# Altium PCB sanpell_cpu_v5.0.4.pcbdoc (part 1 of 2)
Units mm, origin at the board's own origin, x right, y up, seen from the top; angles counter-clockwise.
Board outline 91.48 x 91.59 mm, 4 copper layers (Top Layer, PWR, GND, Bottom Layer); 81 components, 92 nets, 356 pads, 103 vias.
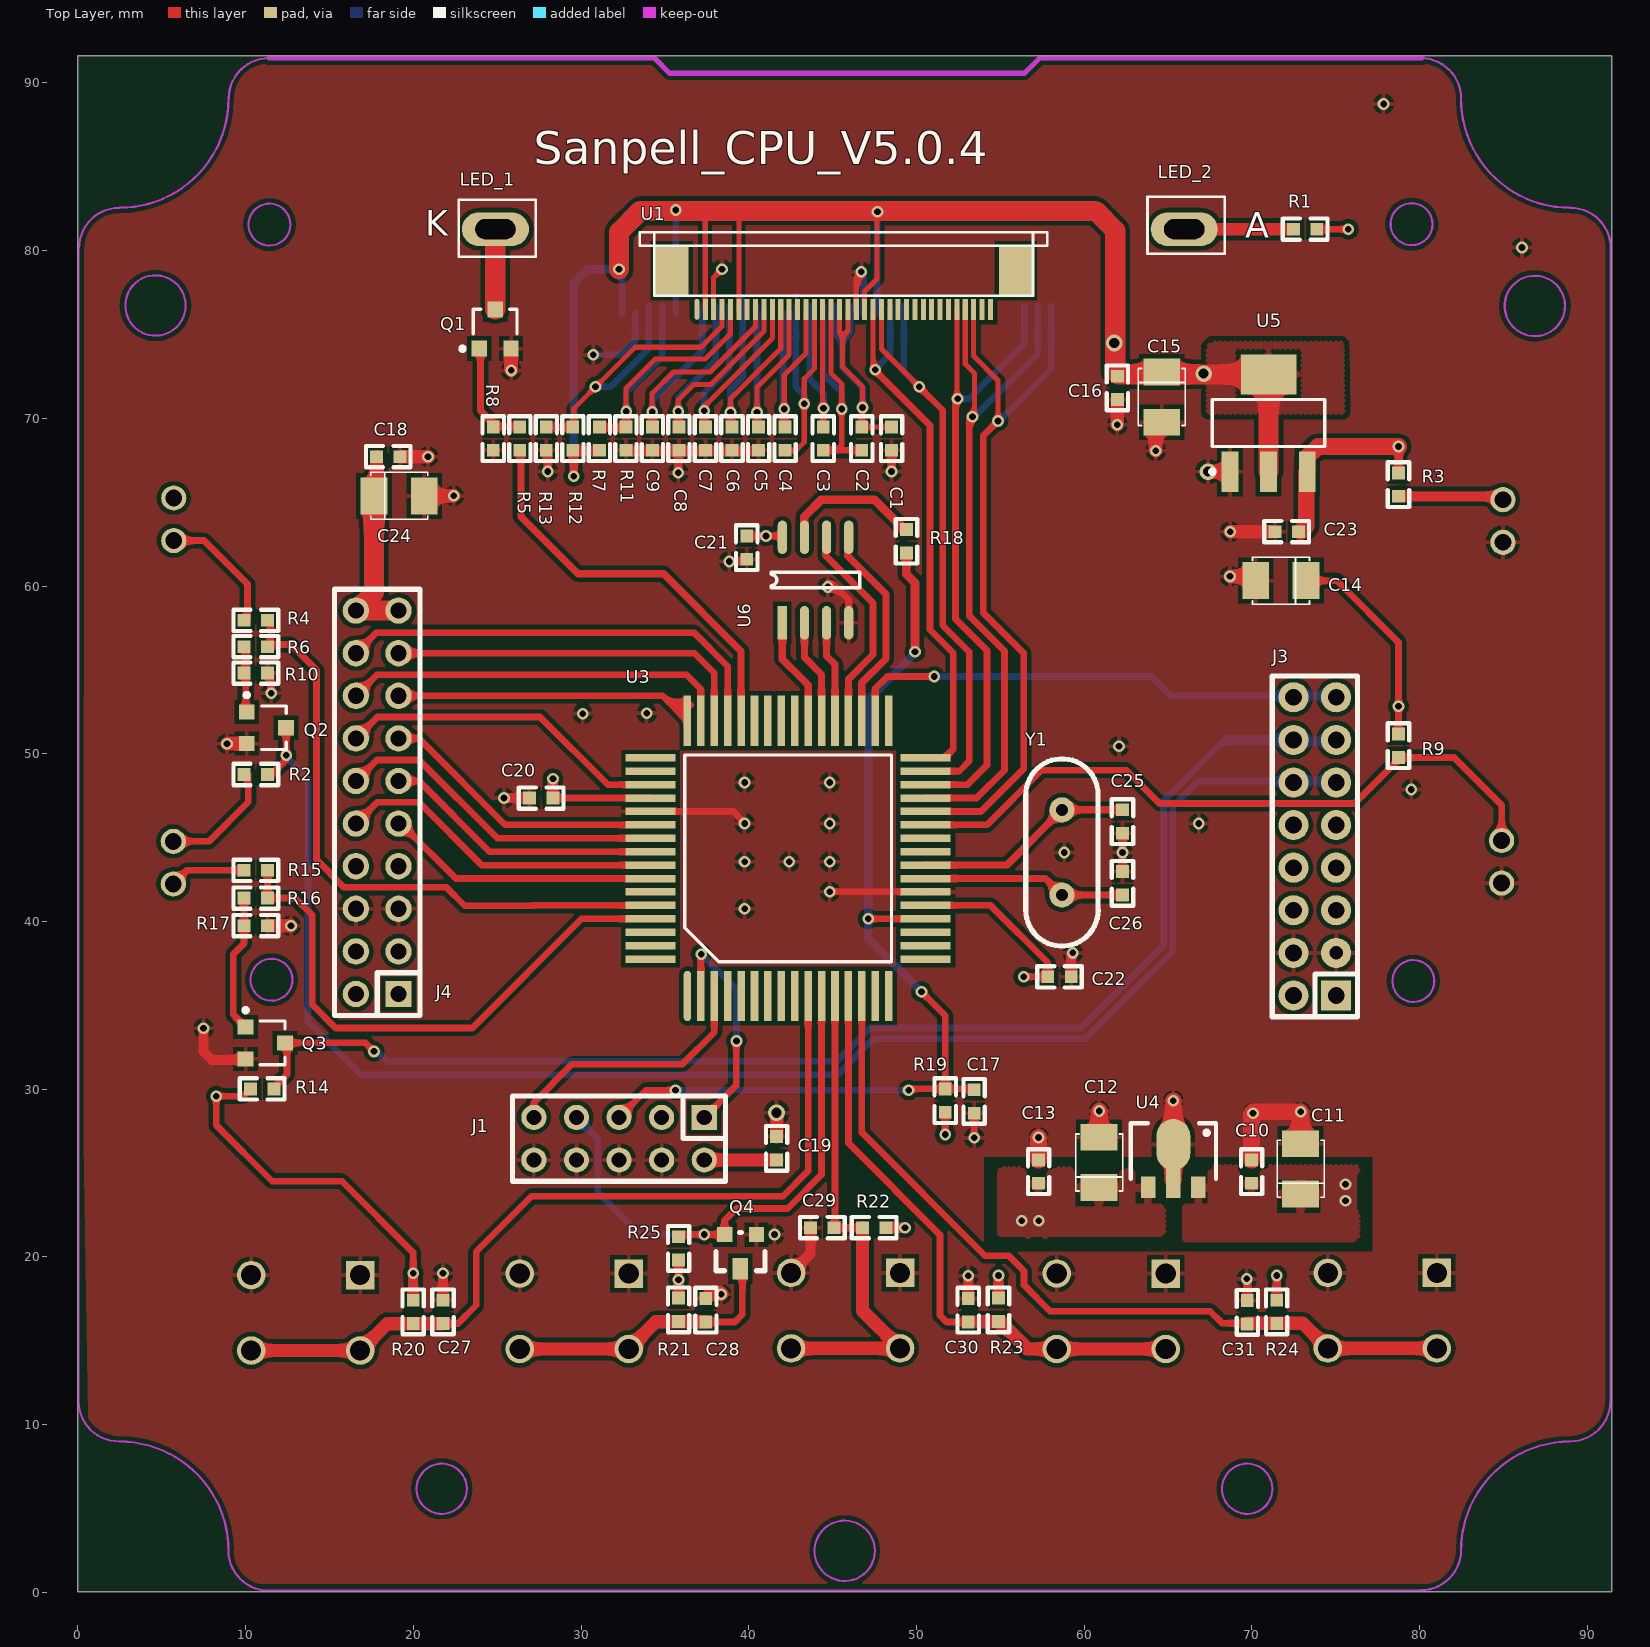
[diagram p0: Top Layer view]
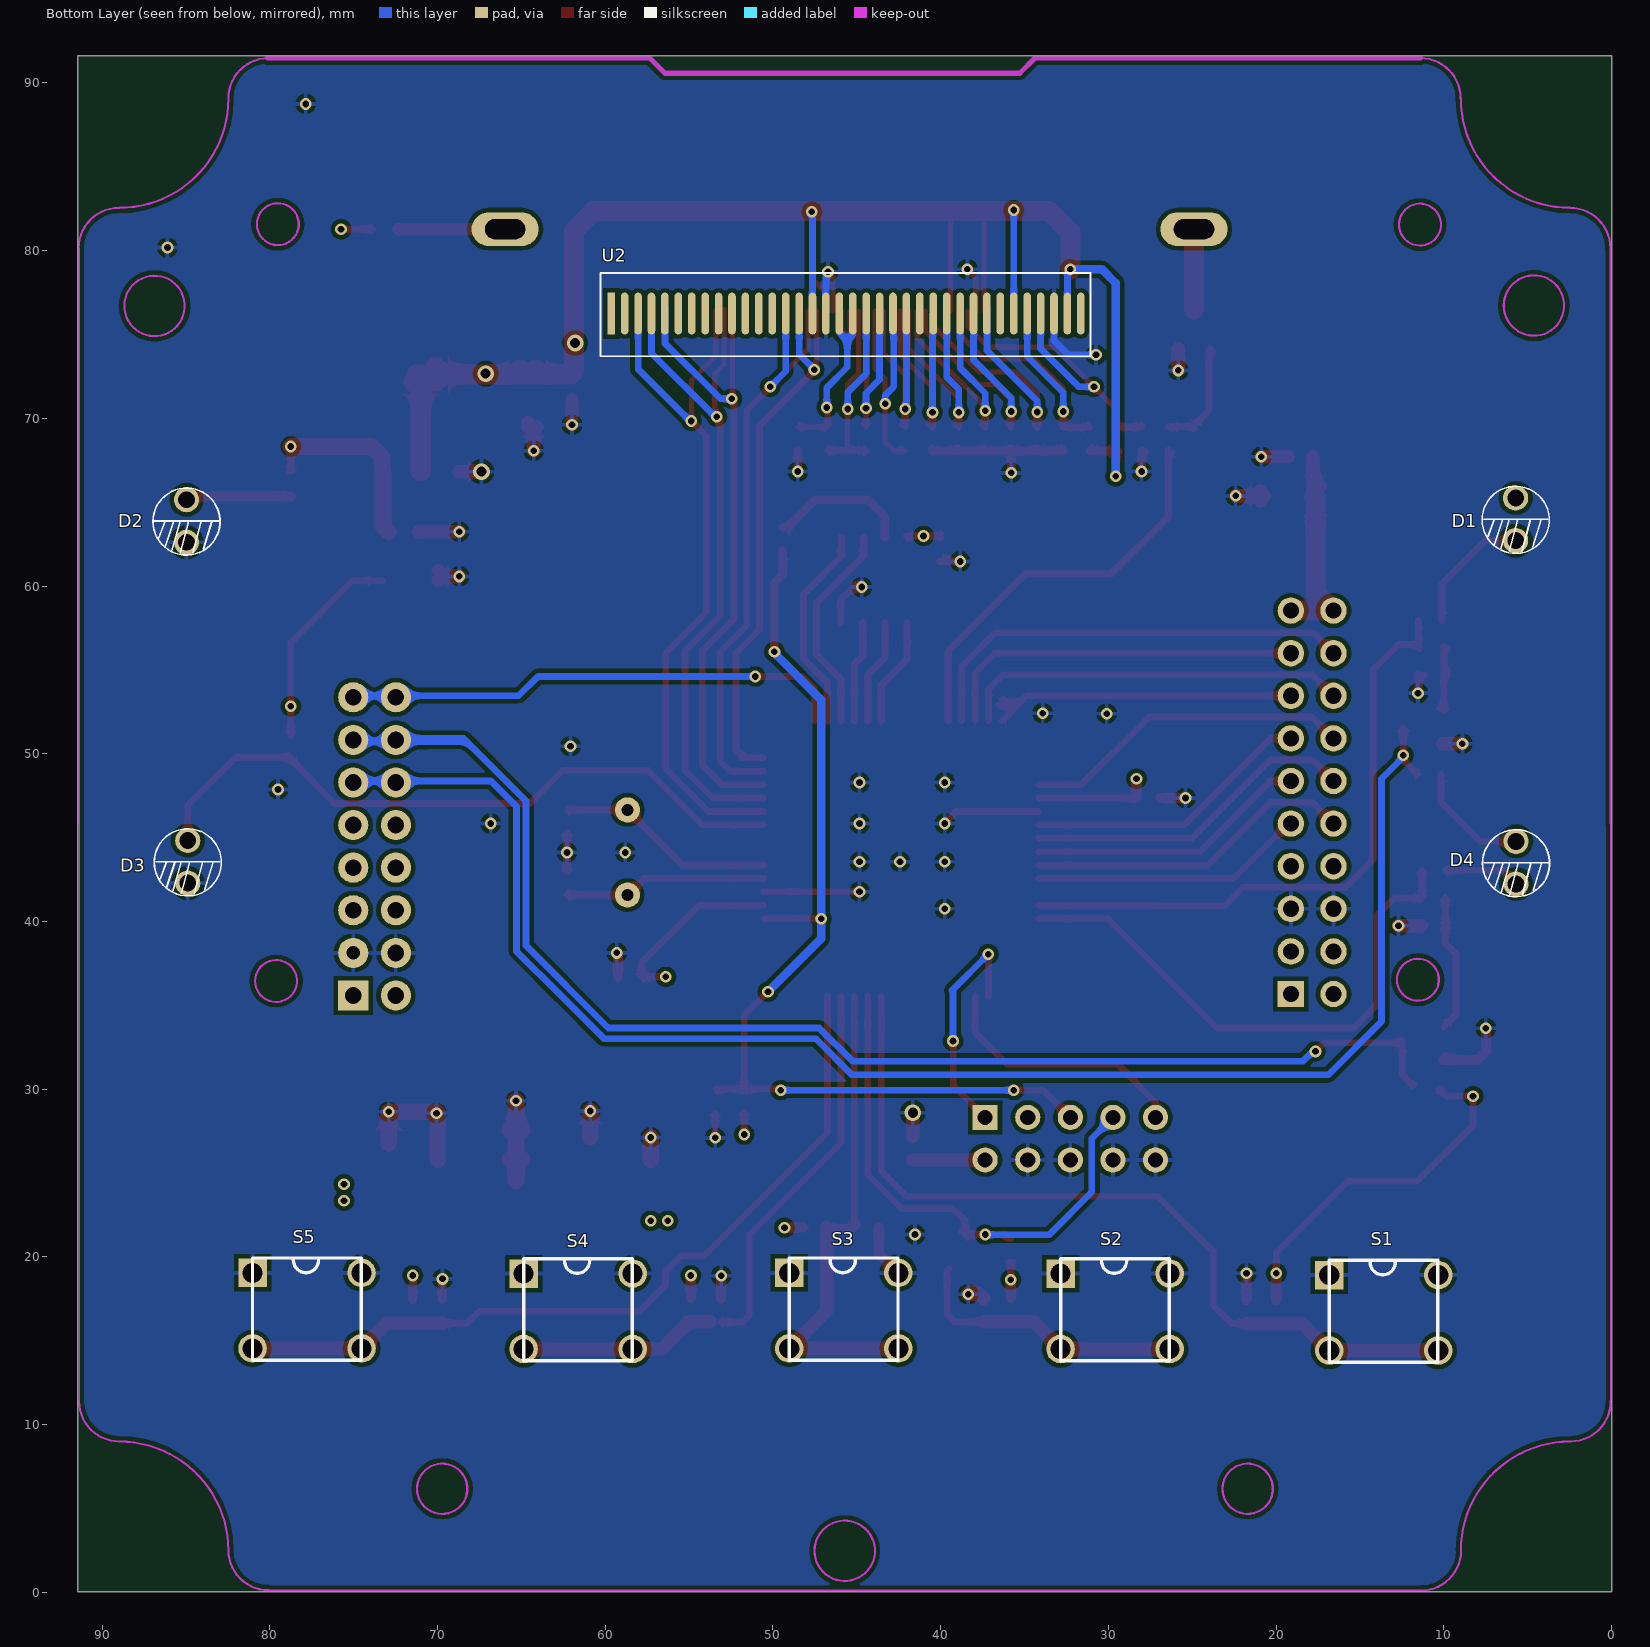
[diagram p1: Bottom Layer view, seen from below]
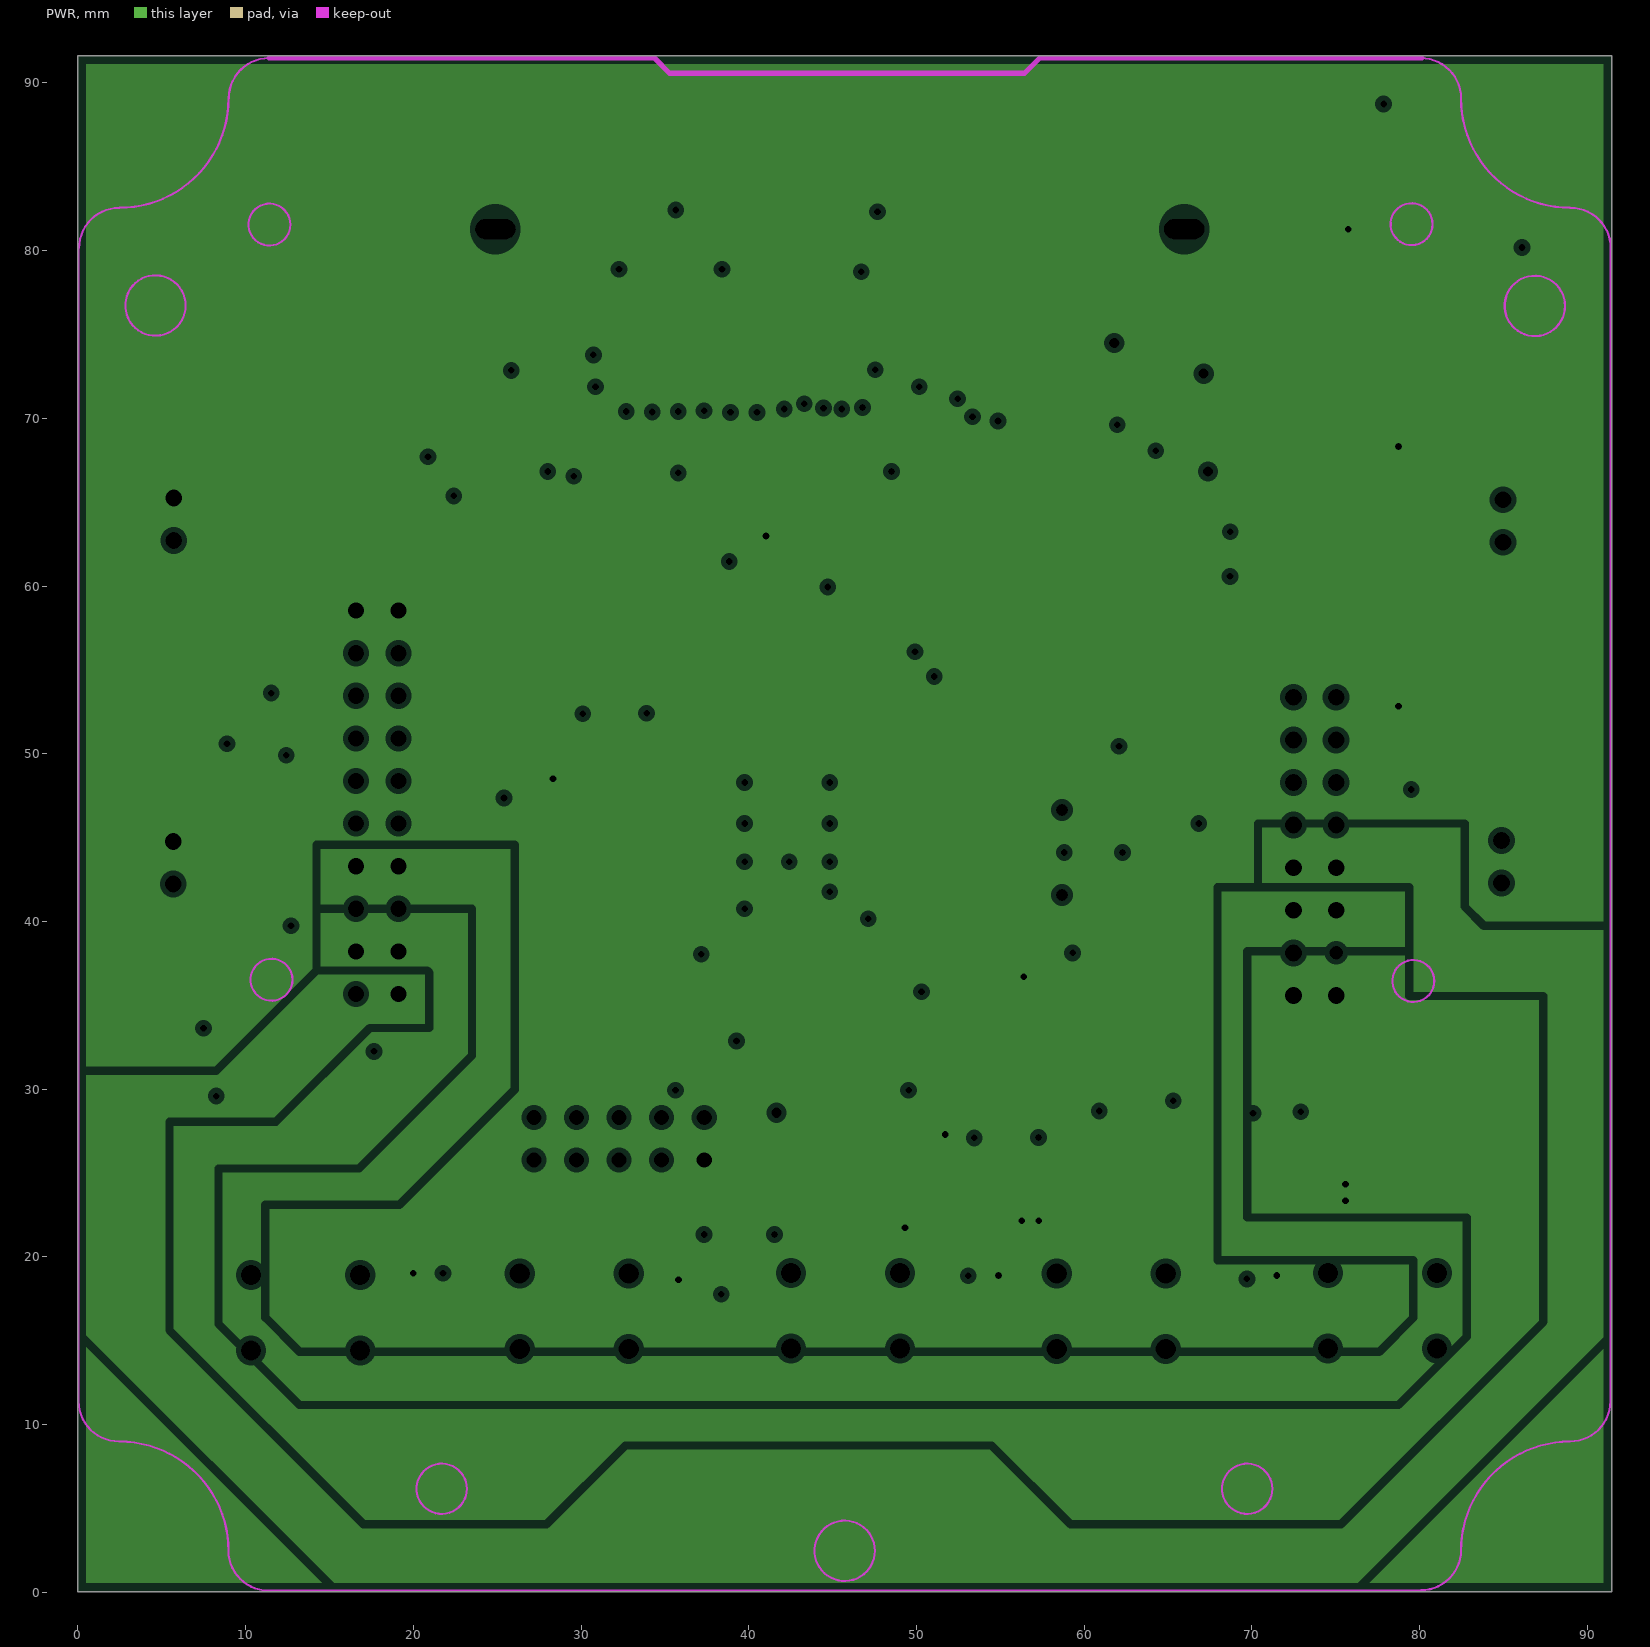
[diagram p2: PWR, clearances drawn from the general rule]
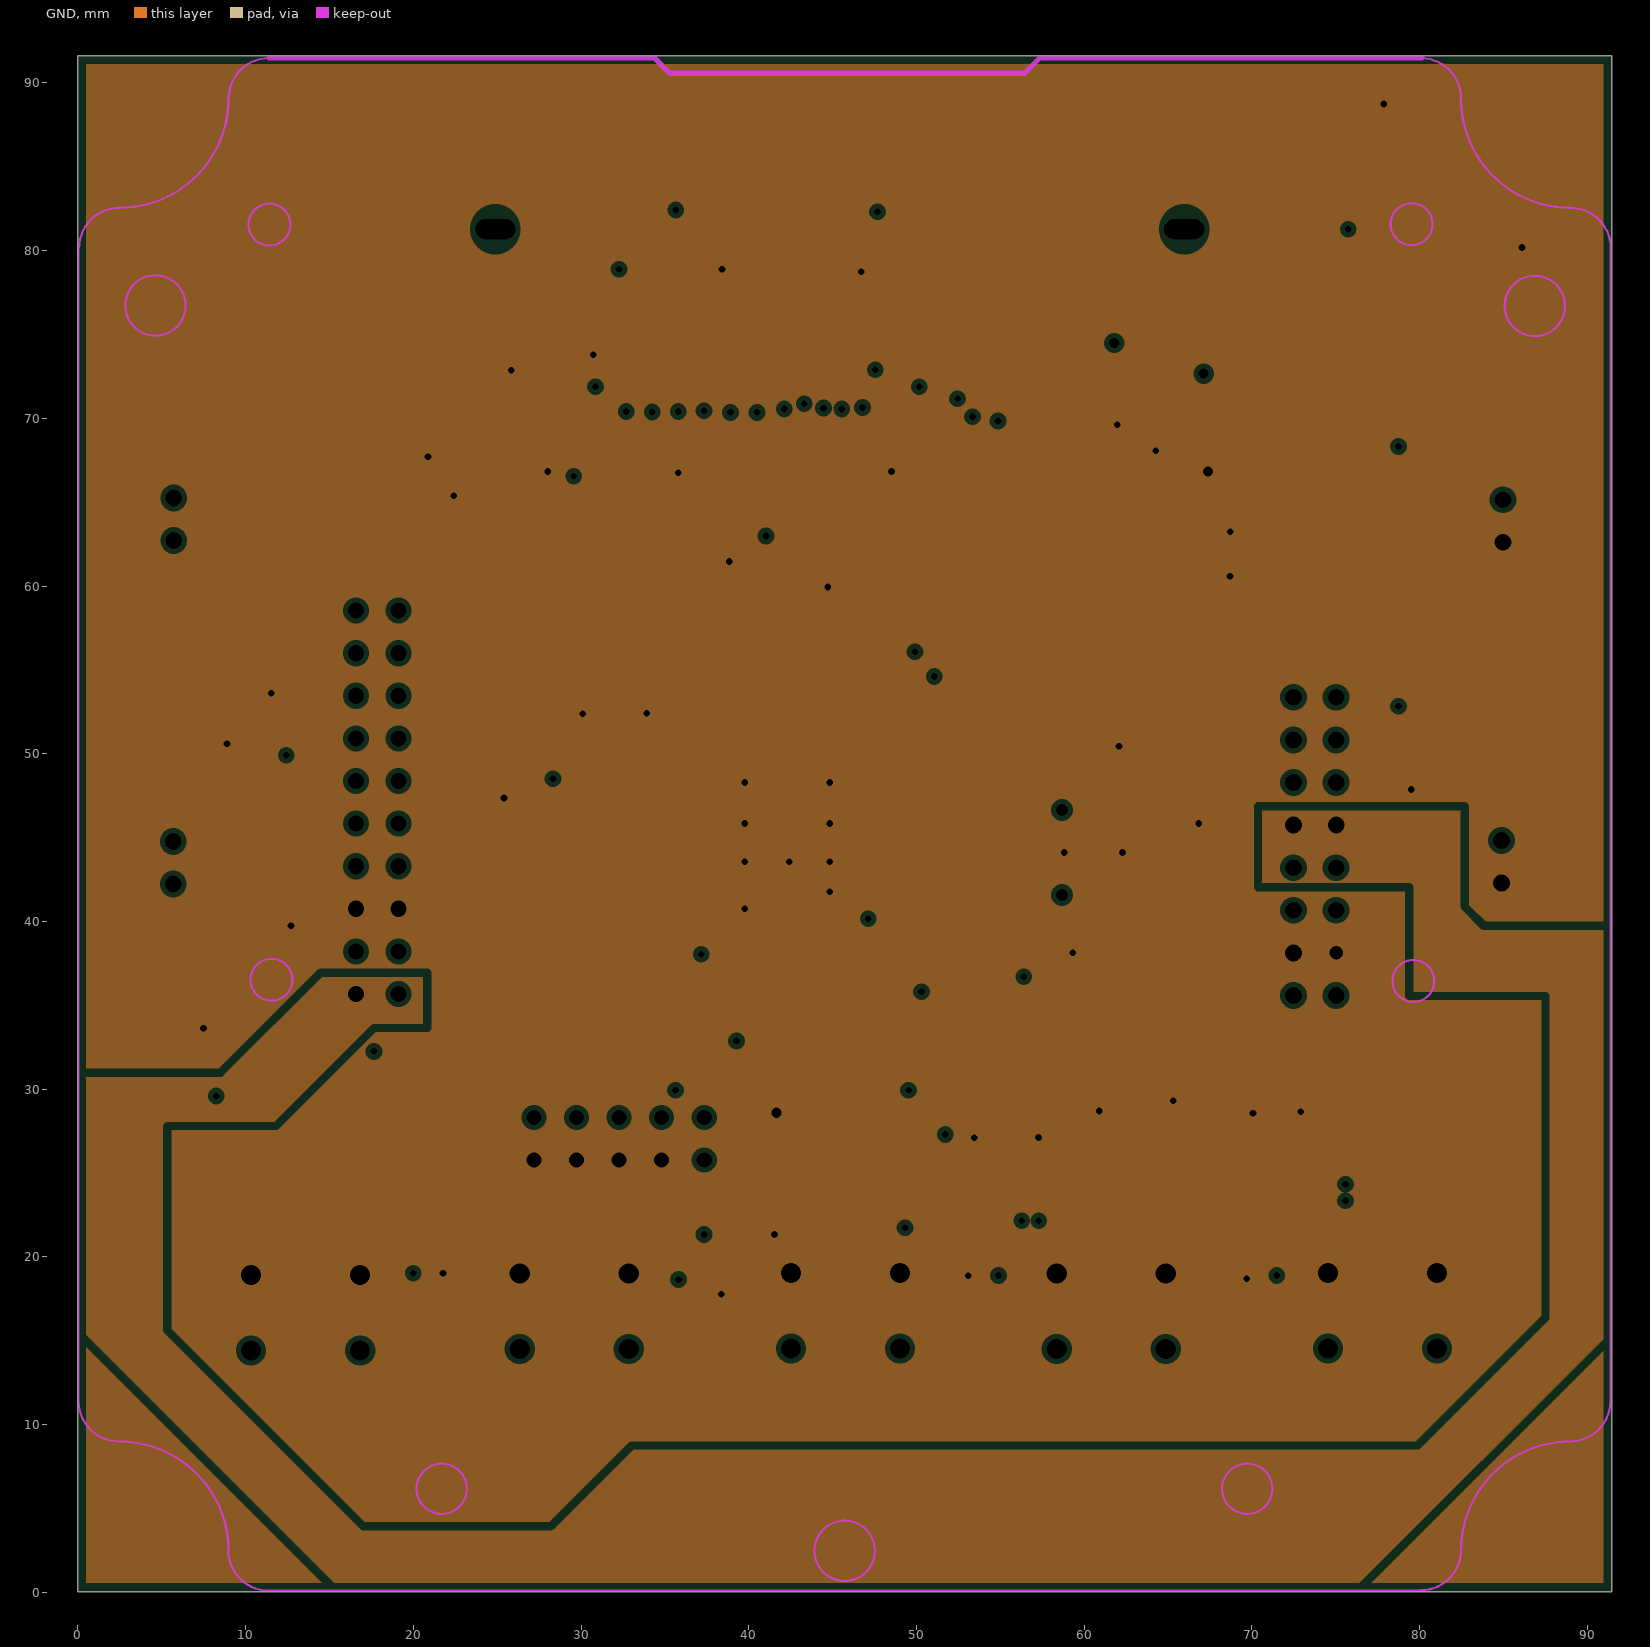
[diagram p3: GND, clearances drawn from the general rule]

## Layer stack, top to bottom
Top Layer: signal copper 0.0356
Dielectric: prepreg 0.32, FR-4, Dk 4.8
PWR: plane copper 0.0356, net (Multiple Nets)
Dielectric: core 0.32, FR-4, Dk 4.8
GND: plane copper 0.0356, net (Multiple Nets)
Dielectric: prepreg 0.32, FR-4, Dk 4.8
Bottom Layer: signal copper 0.0356

## Board outline
-0.02,0.041 91.457,0.041 91.457,91.632 -0.02,91.632

## Design rules (kind name [scope] priority, off if disabled: settings)
Clearance Clearance_poly [InPolygon] p1: gap=0.254
Clearance [All] p2: gap=0.15
ComponentClearance [All] p1: gap=0 collisioncheckmode=3 verticalgap=0.254 showdistances=FALSE
HoleSize [All] p1: absolutevalues=TRUE maxlimit=5 minlimit=0.025 maxpercent=80.000 minpercent=20.000
HoleToHoleClearance [All] p1: gap=0.1 allowstackedmicrovias=TRUE
MinimumSolderMaskSliver [All] p1: minsoldermaskwidth=0
PlaneClearance [All] p1: clearance=0.3
PlaneConnect [All] p1: planeconnectstyle=Relief reliefexpansion=0.508 reliefentries=4 reliefconductorwidth=0.3 reliefairgap=0.3
PolygonConnect [All] p1: connectstyle=Relief reliefconductorwidth=0.254 reliefentries=4 polygonreliefangle="90 Angle" airgapwidth=0.254
RoutingPriority [All] p1: routingpriority=4
RoutingVias [All] p1: holewidth=0.4 width=0.5 viastyle="Through Hole" minholewidth=0.3 minwidth=0.5 maxholewidth=1 maxwidth=3
SilkToSilkClearance [All] p1: silktosilkclearance=0
SilkscreenOverComponentPads [IsPad] p1: minsilkscreentomaskgap=0
SolderMaskExpansion [All] p1: expansion=0.102
Width [All] p1: maxlimit=5.08 minlimit=0.254 preferedwidth=0.254
19 further rules are at their usual default settings.

## Components (designator, comment, footprint, x,y, rotation, side; value= is the part's Value field where it differs from the comment)
C1 "CAP" 0603 48.514,69.494 r270 top
C2 "1uF" 0603 46.736,69.494 r270 top
C3 "1uF" 0603 44.439,69.494 r270 top
C4 "1uF" 0603 42.164,68.097 r90 top
C5 "0.1uF" 0603 40.582,69.494 r270 top
C6 "0.1uF" 0603 39.001,69.494 r270 top
C7 "0.1uF" 0603 37.419,69.494 r270 top
C8 "0.1uF" 0603 35.837,69.494 r270 top
C9 "0.1uF" 0603 34.255,69.494 r270 top
C10 "0.1uF" 0603 69.978,25.788 r270 top
C11 "10uF" B 72.906,23.755 r90 top
C12 "10uF" B 60.892,24.136 r90 top
C13 "0.1uF" 0603 57.278,25.788 r270 top
C14 "10uF" B 73.231,60.325 r180 top
C15 "10uF" B 64.624,72.771 r270 top
C16 "0.1uF" 0603 61.976,72.517 r270 top
C17 "0.1uF" 0603 53.442,28.575 r90 top (schematic designator R19)
C18 "0.1uF" 0603 19.202,67.716 r180 top
C19 "0.1uF" 0603 41.656,27.178 r270 top
C20 "0.1uF" 0603 26.924,47.364 r0 top
C21 "0.1uF" 0603 39.878,61.595 r90 top
C22 "0.1uF" 0603 59.225,36.703 r180 top
C23 "0.1uF" 0603 71.374,63.246 r0 top
C24 "10uF" B 17.653,65.38 r0 top
C25 "22P" 0603 62.281,46.66 r270 top
C26 "22P" 0603 62.281,42.977 r270 top
C27 "0.1uF" 0603 21.768,17.424 r270 top
C28 "0.1uF" 0603 37.44,17.526 r270 top
C29 "0.1uF" 0603 43.688,21.75 r0 top
C30 "0.1uF" 0603 53.086,17.526 r270 top
C31 "0.1uF" 0603 69.723,17.399 r270 top
D1 "Led" LED 5.715,65.253 r270 bottom
D2 "Led" LED 84.963,65.151 r270 bottom
D3 "Led" LED 84.887,44.831 r270 bottom
D4 "Led" LED 5.69,44.78 r270 bottom
J1 "ISP" IDC10 32.264,27.055 r180 top locked
J3 "CON16" IDC16 73.751,44.482 r90 top locked
J4 "HEADER 10X2" IDC20 19.116,35.68 r90 top locked
LED_1 "CON1" LEC_A#1 24.892,81.28 r0 top
LED_2 "CON1" LEC_A#2 65.964,81.458 r0 top
Q1 "C9013" 9013 24.882,75.329 r0 top
Q2 "C9013" 9013 11.243,51.555 r270 top
Q3 "C9013" 9013 11.176,32.766 r270 top
Q4 "WNM2021-3/TR" SOT-23 40.462,21.336 r180 top
R1 "100" 0603 73.868,81.28 r180 top
R2 "10K" 0603 11.303,48.768 r180 top
R3 "10K" 0603 78.74,66.751 r270 top
R4 "10K" 0603 11.303,57.963 r180 top
R5 "1K" 0603 26.347,69.494 r270 top
R6 "1K" 0603 11.303,56.388 r180 top
R7 "0" 0603 31.092,68.097 r90 top
R8 "10K" 0603 24.765,68.097 r90 top
R9 "10K" 0603 78.74,51.181 r270 top
R10 "100K" 0603 11.303,54.813 r180 top
R11 "1k" 0603 32.674,68.097 r90 top
R12 "1k" 0603 29.51,68.097 r90 top
R13 "0" 0603 27.928,68.097 r90 top
R14 "10K" 0603 11.684,30.023 r180 top
R15 "10K" 0603 11.303,43.053 r180 top
R16 "1K" 0603 11.303,41.402 r180 top
R17 "100K" 0603 11.303,39.751 r180 top
R18 "NC" 0603 49.403,61.976 r90 top
R19 "10K" 0603 51.714,30.023 r270 top (schematic designator C17)
R20 "100K" 0603 19.99,16.027 r90 top
R21 "10K" 0603 35.814,16.154 r90 top
R22 "100K" 0603 46.78,21.75 r0 top
R23 "100K" 0603 54.889,16.154 r90 top
R24 "100K" 0603 71.476,16.027 r90 top
R25 "10K" 0603 35.814,21.209 r270 top
S1 "" SW3-DIP 16.83,18.923 r180 bottom
S2 "" SW3-DIP 32.846,19.013 r180 bottom
S3 "" SW3-DIP 49.022,19.05 r180 bottom
S4 "" SW3-DIP 64.864,19.013 r180 bottom
S5 "" SW3-DIP 81.026,19.05 r180 bottom
U1 "CON36" LCD_36 54.407,76.504 r270 top
U2 "CON36" SOP36-JLX 59.639,76.251 r90 bottom
U3 "Atmega128A-AU" Quad64 42.342,43.383 r90 top locked
U4 "7805" 7805 66.81,24.162 r0 top
U5 "ASM1117_2" MP04A_N 70.993,69.723 r90 top
U6 "X5045" SOP8 42,57.81 r90 top locked
Y1 "8M" CY 58.674,44.12 r270 top

## Footprints (in the part's own frame and the unit in brackets; to place one, negate y for a bottom-side part, rotate by r counter-clockwise, add the part's x,y. Pads: shape width x height; smd on the part's side, far side on the other; paste and mask are expansions set on the pad)
0603 [mil]
  rect 30x30 smd: 1(0,0) 2(55,0)
  silkscreen extent -25,-25 80,25
7805 [mil]
  rect 34x50 smd: 1(0.08,-0.02) 3(-117.92,-0.02)
  rect 34x78.74 smd: 2(-58.92,13.98)
  oval 80x120 smd: 4(-58.92,99.98)
  silkscreen extent -159,20 41,150
9013 [mm]
  rect 0.9x0.95 smd: 1(-0.95,-1.175) 2(0.95,-1.175) 3(0,1.175)
  silkscreen extent -2.07,-1.3 1.3,1.18
B [mm]
  rect 1.6x2.2 smd: 1(0,0) 2(3,0)
  silkscreen extent -0.2,-1.4 3.2,1.4
CY [mm]
  round 1.5 hole 0.711: 1(-2.54,0) 2(2.54,0)
  silkscreen extent -5.58,-2.16 5.58,2.16
IDC10 [mm]
  rect 1.5x1.5 hole 0.9: 1(-5.08,-1.27)
  round 1.5 hole 0.9: 2(-5.08,1.27) 3(-2.54,-1.27) 4(-2.54,1.27) 5(0,-1.27) 6(0,1.27) 7(2.54,-1.27) 8(2.54,1.27) 9(5.08,-1.27) 10(5.08,1.27)
  silkscreen extent -6.35,-2.54 6.35,2.54
IDC16 [mm]
  rect 1.8x1.8 hole 1: 1(-8.89,-1.27)
  round 1.8 hole 1: 2(-8.89,1.27) 4(-6.35,1.27) 5(-3.81,-1.27) 6(-3.81,1.27) 7(-1.27,-1.27) 8(-1.27,1.27) 9(1.27,-1.27) 10(1.27,1.27) 11(3.81,-1.27) 12(3.81,1.27) 13(6.35,-1.27) 14(6.35,1.27) 15(8.89,-1.27) 16(8.89,1.27)
  round 1.8 hole 0.8: 3(-6.35,-1.27)
  silkscreen extent -10.16,-2.54 10.16,2.54
IDC20 [mil]
  rect 62x62 hole 38: 1(0,0)
  round 62 hole 38: 2(0,100) 3(100,0) 4(100,100) 5(200,0) 6(200,100) 7(300,0) 8(300,100) 9(400,0) 10(400,100) 11(500,0) 12(500,100) 13(600,0) 14(600,100) 15(700,0) 16(700,100) 17(800,0) 18(800,100) 19(900,0) 20(900,100)
  silkscreen extent -50,-50 950,150
LCD_36 [mm]
  rect 1.25x0.3 smd: 1(0,0) 2(0,-0.5) 3(0,-1) 4(0,-1.5) 5(0,-2) 6(0,-2.5) 7(0,-3) 8(0,-3.5) 9(0,-4) 10(0,-4.5) 11(0,-5) 12(0,-5.5) 13(0,-6) 14(0,-6.5) 15(0,-7) 16(0,-7.5) 17(0,-8) 18(0,-8.5) 19(0,-9) 20(0,-9.5) 21(0,-10) 22(0,-10.5) 23(0,-11) 24(0,-11.5) 25(0,-12) 26(0,-12.5) 27(0,-13) 28(0,-13.5) 29(0,-14) 30(0,-14.5) 31(0,-15) 32(0,-15.5) 33(0,-16) 34(0,-16.5) 35(0,-17)
  oval 1.25x0.3 smd: 36(0,-17.5)
  rect 3x2 smd: 37(-2.3,1.5) 38(-2.3,-19)
  silkscreen extent -4.6,-20.9 -0.8,3.4
LEC_A#1 [mm]
  oval 4x2 hole 1.2 slot 2.4 at 0 deg: 1(0,0)
  silkscreen extent -2.19,-1.64 2.41,1.76
LEC_A#2 [mm]
  oval 4x2 hole 1.2 slot 2.4 at 0 deg: 1(0,-0.178)
  silkscreen extent -2.19,-1.64 2.41,1.76
LED [mm]
  round 1.5 hole 1: 1(0,0) 2(2.54,0)
  silkscreen extent -0.7,-2 3.3,2
MP04A_N [mm] "SOT223, 4-Leads, Body 6.5x3.5mm, Pitch 2.3mm, Lead Span 7mm, IPC Medium Density"
  rect 2.4x1 smd: 1(-2.9,2.3) 2(-2.9,0) 3(-2.9,-2.3)
  rect 2.4x3.3 smd: 4(2.9,0)
  silkscreen extent -3.02,-3.35 1.4,3.47, body extent -1.85,-3.35 1.85,3.35, height 1.8
Quad64 [mm]
  oval 3x0.45 smd: 1(-7.819,6)
  rect 3x0.45 smd: 2(-7.819,5.2) 3(-7.819,4.4) 4(-7.819,3.6) 5(-7.819,2.8) 6(-7.819,2) 7(-7.819,1.2) 8(-7.819,0.4) 9(-7.819,-0.4) 10(-7.819,-1.2) 11(-7.819,-2) 12(-7.819,-2.8) 13(-7.819,-3.6) 14(-7.819,-4.4) 15(-7.819,-5.2) 16(-7.819,-6) 33(8.581,-6) 34(8.581,-5.2) 35(8.581,-4.4) 36(8.581,-3.6) 37(8.581,-2.8) 38(8.581,-2) 39(8.581,-1.2) 40(8.581,-0.4) 41(8.581,0.4) 42(8.581,1.2) 43(8.581,2) 44(8.581,2.8) 45(8.581,3.6) 46(8.581,4.4) 47(8.581,5.2) 48(8.581,6)
  rect 0.45x3 smd: 17(-5.619,-8.2) 18(-4.819,-8.2) 19(-4.019,-8.2) 20(-3.219,-8.2) 21(-2.419,-8.2) 22(-1.619,-8.2) 23(-0.819,-8.2) 24(-0.019,-8.2) 25(0.781,-8.2) 26(1.581,-8.2) 27(2.381,-8.2) 28(3.181,-8.2) 29(3.981,-8.2) 30(4.781,-8.2) 31(5.581,-8.2) 32(6.381,-8.2) 49(6.381,8.2) 50(5.581,8.2) 51(4.781,8.2) 52(3.981,8.2) 53(3.181,8.2) 54(2.381,8.2) 55(1.581,8.2) 56(0.781,8.2) 57(-0.019,8.2) 58(-0.819,8.2) 59(-1.619,8.2) 60(-2.419,8.2) 61(-3.219,8.2) 62(-4.019,8.2) 63(-4.819,8.2) 64(-5.619,8.2)
  silkscreen extent -5.78,-6.16 6.55,6.17
SOP8 [mm]
  rect 2x0.55 smd: 1(0,0)
  oval 2x0.55 smd: 2(0,-1.32) 3(0,-2.64) 4(0,-3.96) 5(5.1,-3.96) 6(5.1,-2.64) 7(5.1,-1.32) 8(5.1,0)
  silkscreen extent 2.08,-4.62 3.01,0.66
SOP36-JLX [mm]
  rect 2.5x0.45 smd: 1(0,0)
  oval 2.5x0.45 smd: 2(0,-0.8) 3(0,-1.6) 4(0,-2.4) 5(0,-3.2) 6(0,-4) 7(0,-4.8) 8(0,-5.6) 9(0,-6.4) 10(0,-7.2) 11(0,-8) 12(0,-8.8) 13(0,-9.6) 14(0,-10.4) 15(0,-11.2) 16(0,-12) 17(0,-12.8) 18(0,-13.6) 19(0,-14.4) 20(0,-15.2) 21(0,-16) 22(0,-16.8) 23(0,-17.6) 24(0,-18.4) 25(0,-19.2) 26(0,-20) 27(0,-20.8) 28(0,-21.6) 29(0,-22.4) 30(0,-23.2) 31(0,-24) 32(0,-24.8) 33(0,-25.6) 34(0,-26.4) 35(0,-27.2) 36(0,-28)
  silkscreen extent -2.54,-28.57 2.41,0.64
SOT-23 [mil]
  rect 36x36 smd: 1(0,0) 2(75,0)
  rect 36x50 smd: 3(38,80)
  silkscreen extent -20,-5 95,85
SW3-DIP [mm]
  rect 1.7x1.7 hole 1.2: 1(0,0)
  round 1.7 hole 1.2: 1(6.5,0) 2(0,-4.5) 2(6.5,-4.5)
  silkscreen extent 0,-5.21 6.48,0.89

## Part data
C1: "Capacitor"
C2 C3 C4 C5 C6 C7 C8 C9: library part CAP, "Capacitor"
C10 C11 C12 C13 C14 C15 C16 C18 C19 C20 C21 C22 C23 C24 C25 C26 C27 C28 C29 C30 C31 R19: library part Cap, "C?"
C17 R1 R2 R3 R4 R5 R6 R7 R8 R9 R10 R11 R12 R13 R14 R15 R16 R17 R18 R20 R21 R22 R23 R24 R25: library part Res, "R?"
D1 D2 D3 D4: "D?"
J1: library part isp, "U?"
J3 LED_1 LED_2 U1 U2: "Connector"
Q1 Q2 Q3: library part Npn, "Q?"
Q4: library part "MOSFET N", "NMOS,WNM2021-3/TR,SOT_323,Id=0.89A,Vds=20V"
S1 S2 S3 S4 S5: library part Sw-pb, "S?"
U3: library part Atmega128, "U?"
U4: "U"
Y1: library part Xtal, "Y?"

## Via types
v1: diameter 0.7, hole 0.4, Top Layer to Bottom Layer, 99 vias
v2: diameter 1, hole 0.6, Top Layer to Bottom Layer, 4 vias

## Nets (pads, with @x,y where several pads share a name; then routed paths per layer and width w, separated by ;. In a path a pad name is that pad's centre, name@x,y a point inside that pad or via, vN(x,y) a via of type N, cw(c..) or ccw(c..) an arc to the next point about the centre after c; other vN are vias at no path point)
+12V: C10.2 C11.1 J3.1 J3.2 J4.3 J4.4 U4.1
  other v1: 75.573,23.349 75.573,24.34
+24V: J3.7 J3.8 J4.1
-12V: J3.5 J3.6 J4.7 J4.8
C1N: C2.2 C3.2 U1.20 U2.20 | length 21
  Top Layer w0.305: U1.20@44.907,76.403 44.907,72.695 45.542,72.06 v1(45.542,70.561) 45.542,68.402 45.237,68.097 ; v1@45.402,70.421 cw(c45.065,70.084) 45.542,70.084 cw(c46.019,70.084) v1@45.682,70.421 ; v1@45.402,70.701 ccw(c45.065,71.038) 45.542,71.038 ccw(c46.019,71.038) v1@45.682,70.701
  Top Layer w0.4: C3.2@44.439,68.072 44.465,68.097 45.237,68.097 C2.2@46.736,68.097 ; C3.2@44.567,67.969 cw(c44.876,67.66) 44.876,68.097 cw(c44.876,68.534) C3.2@44.567,68.225 ; C2.2@46.608,67.969 ccw(c46.299,67.66) 46.299,68.097 ccw(c46.299,68.534) C2.2@46.608,68.225
  Bottom Layer w0.4: U2.20@44.435,76.251 U2.20@44.435,76.701 ; U2.20@44.439,76.251 44.439,72.655 45.542,71.552 v1(45.542,70.561) ; v1@45.436,70.667 ccw(c45.18,70.923) 45.542,70.923 ccw(c45.904,70.923) v1@45.648,70.667
C1P: C3.1 U1.21 U2.21 | length 16.3
  Top Layer w0.305: C3.1@44.278,69.656 ccw(c43.887,70.046) 44.439,70.046 ccw(c44.991,70.046) C3.1@44.601,69.656 ; v1@44.31,70.472 cw(c43.999,70.161) 44.439,70.161 ; v1@44.31,70.752 ccw(c44.077,70.985) 44.407,70.985 ; 44.407,71.193 ccw(c45.031,71.193) v1@44.59,70.752 ; U1.21@44.407,76.403 44.407,70.655 v1@44.439,70.623 ; C3.1@44.439,69.469 C3.1@44.439,69.494 v1@44.439,70.623 ; 44.439,70.109 cw(c44.953,70.109) v1@44.59,70.472 ; v1(44.45,70.612) v1@44.439,70.623
  Bottom Layer w0.4: U2.21@43.635,76.251 U2.21@43.635,76.701 ; U2.21@43.639,76.251 43.639,72.312 44.45,71.501 v1(44.45,70.612) ; v1@44.344,70.718 ccw(c44.088,70.974) 44.45,70.974 ccw(c44.812,70.974) v1@44.556,70.718
C2N: C4.2 U1.23 U2.23 | length 15.4
  Top Layer w0.305: v1@41.973,70.701 ccw(c41.636,71.038) 42.113,71.038 ccw(c42.59,71.038) v1@42.253,70.701 ; v1(42.113,70.561) 42.113,72.588 43.407,73.882 U1.23@43.407,76.403
  Top Layer w0.4: v1@42.007,70.455 cw(c41.751,70.199) 42.113,70.199 cw(c42.475,70.199) v1@42.219,70.455 ; C4.2@42.113,69.494 v1(42.113,70.561) ; 42.113,70.054 ccw(c42.724,70.054) C4.2@42.292,69.622
  Bottom Layer w0.4: 42.039,71.102 ccw(c42.654,71.102) v1@42.219,70.667 ; U2.23@42.039,76.251 42.039,70.635 v1(42.113,70.561)
C2P: C4.1 U1.22 U2.22 | length 19.6
  Top Layer w0.305: C4.1@42.164,68.072 42.799,68.072 43.307,68.58 v1(43.307,70.866) 43.307,72.365 43.907,72.964 U1.22@43.907,76.403 ; C4.1@42.326,67.936 cw(c42.655,67.607) 42.655,68.072 ; C4.1@42.326,68.259 ccw(c42.777,68.711) 42.777,68.072 ; v1@43.167,70.726 cw(c42.83,70.389) 43.307,70.389 cw(c43.784,70.389) v1@43.447,70.726 ; v1@43.167,71.006 ccw(c42.83,71.343) 43.307,71.343 ccw(c43.784,71.343) v1@43.447,71.006
  Bottom Layer w0.254: U2.22@42.839,76.251 U2.22@42.839,77.383
  Bottom Layer w0.4: U2.22@42.835,76.251 U2.22@42.835,76.701 ; U2.22@42.839,76.251 42.799,76.211 42.799,71.882 43.307,71.374 v1(43.307,70.866) ; v1@43.201,70.972 ccw(c42.945,71.228) 43.307,71.228 ccw(c43.669,71.228) v1@43.413,70.972
CS-CS: J4.16 U3.47 | length 23.3
  Top Layer w0.4: J4.16@16.576,53.46 17.828,54.712 36.278,54.712 37.142,53.848 U3.47@37.142,51.964
CS-SCK: J4.15 U3.48 | length 20.9
  Top Layer w0.4: J4.15@19.116,53.46 34.846,53.46 ; 35.217,53.089 ccw(c35.987,53.86) U3.48@36.528,52.914 ; U3.48@36.329,53.261 cw(c35.718,54.331) 34.846,53.46 ; U3.48@36.342,51.964 34.846,53.46
CS-SDI: J4.17 U3.46 | length 24.4
  Top Layer w0.4: J4.17@19.116,56 36.761,56 37.942,54.819 U3.46@37.942,51.964 ; J4.17@19.531,55.584 cw(c20.534,54.582) 20.534,56 cw(c20.534,57.418) J4.17@19.531,56.415
CS-SDO: J4.18 U3.45 | length 26.8
  Top Layer w0.4: J4.18@16.576,56 17.802,57.226 36.735,57.226 38.742,55.22 U3.45@38.742,51.964
D0: U2.8
D1: U2.9
D2: U2.10
D3: U2.11
D4: U2.12
D5: U2.13
GND: C1.2 C5.2 C6.2 C7.2 C8.2 C9.2 C10.1 C11.2 C12.2 C13.1 C14.2 C15.2 C16.2 C17.1 C18.1 C19.1 C20.1 C21.1 C22.1 C23.1 C24.2 C25.2 C26.1 C27.1 C28.1 C29.1 C30.1 C31.1 D2.2 D3.2 J1.4 J1.6 J1.8 J1.10 J3.3 J3.4 J4.5 J4.6 Q1.2 Q2.2 Q3.2 Q4.1 R8.1 R10.1 R11.1 R13.1 R17.1 S1.1 S2.1 S3.1 S4.1 S5.1 U1.17 U1.34 U2.17 U2.34 U3.22 U3.53 U4.2 U4.4 U5.1 U6.4 | length 124
  Top Layer w0.305: U1.34@37.907,76.403 U1.34@37.907,76.504 37.907,78.394 v1(38.405,78.892) ; v1@38.207,78.892 cw(c37.73,78.892) 38.067,78.555 cw(c38.405,78.218) v1@38.405,78.695 ; U1.17@46.407,76.403 U1.17@46.407,76.504 46.407,78.436 ; 46.407,77.529 cw(c47.921,77.529) v1@46.85,78.6 ; 46.407,78.265 cw(c47.185,78.265) v1@46.635,78.816 ; v1@46.514,78.725 cw(c46.146,78.697) 46.407,78.436 ; v1@46.695,78.543 ccw(c46.667,78.176) 46.407,78.436 ; v1(46.711,78.74) 46.407,78.436
  Top Layer w0.4: R10.1@11.175,54.685 cw(c10.314,53.824) v1@11.532,53.824 ; v1@11.402,53.694 ccw(c10.931,53.966) 11.456,54.107 ; v1@11.426,53.725 ccw(c11.169,53.982) 11.532,53.982 ccw(c11.894,53.982) v1@11.638,53.725 ; v1(11.532,53.619) R10.1@11.532,54.813 ; U3.53@34.142,46.564 39.078,46.564 v1@39.878,45.764 ; v1(38.835,61.468) C21.1@40.081,61.468 ; v1@38.91,61.598 ccw(c39.223,62.141) 39.386,61.535 ; v1@38.941,61.362 cw(c39.197,61.106) 39.197,61.468 cw(c39.197,61.83) v1@38.941,61.574 ; v1@39.134,61.468 ccw(c39.134,62.339) C21.1@39.75,61.723 ; 39.464,46.179 cw(c39.132,45.847) v1@39.601,45.847 ; v1@44.704,59.794 cw(c44.704,58.191) 45.838,59.324 ; v1(44.704,59.944) 45.218,59.944 45.96,59.202 U6.4@45.96,57.81 ; v1@44.704,60.194 cw(c44.704,59.557) 45.155,60.007 ; v1@44.81,59.838 cw(c45.066,59.582) 45.066,59.944 cw(c45.066,60.306) v1@44.81,60.05 ; v1(44.831,41.783) 50.523,41.783 U3.22@50.542,41.764 ; v1@44.937,41.677 cw(c45.193,41.421) 45.193,41.783 cw(c45.193,42.145) v1@44.937,41.889 ; C17.1@53.314,28.447 cw(c53.005,28.138) 53.442,28.138 cw(c53.879,28.138) C17.1@53.57,28.447 ; v1@53.336,27.208 ccw(c53.079,27.464) 53.442,27.464 ccw(c53.804,27.464) v1@53.548,27.208 ; v1(53.442,27.102) C17.1@53.442,28.575
  Top Layer w0.432: C26.1@62.164,43.094 ccw(c61.882,43.375) 62.281,43.375 ccw(c62.679,43.375) C26.1@62.398,43.094 ; C25.2@62.164,45.146 cw(c61.882,44.864) 62.281,44.864 cw(c62.679,44.864) C25.2@62.398,45.146 ; C26.1@62.281,42.977 v1(62.281,44.12) C25.2@62.281,45.263
  Top Layer w0.5: v1(48.514,66.827) C1.2@48.514,68.097
  Top Layer w0.508: v1(22.403,65.38) v1@22.428,65.38 ; R13.1@27.839,68.008 cw(c27.41,67.579) 28.016,67.579 ; v1(28.016,66.827) R13.1@28.016,68.072 ; R11.1@32.69,68.047 C8.2@35.789,68.047 ; R11.1@32.763,68.187 ccw(c33.103,68.527) 33.103,68.047 ; 33.826,68.047 ccw(c33.826,68.527) C9.2@34.166,68.187 ; C9.2@34.345,68.187 ccw(c34.685,68.527) 34.685,68.047 ; 35.408,68.047 ccw(c35.408,68.527) C8.2@35.747,68.187 ; v1(35.789,66.751) C8.2@35.789,68.047 ; 35.789,67.674 cw(c36.261,67.674) C8.2@35.927,68.008 ; C8.2@35.927,68.187 ccw(c36.266,68.527) 36.266,68.047 ; 36.99,68.047 ccw(c36.99,68.527) C7.2@37.329,68.187 ; C7.2@37.509,68.187 ccw(c37.848,68.527) 37.848,68.047 ; 38.571,68.047 ccw(c38.571,68.527) C6.2@38.911,68.187 ; C6.2@39.09,68.187 ccw(c39.43,68.527) 39.43,68.047 ; 40.153,68.047 ccw(c40.153,68.527) C5.2@40.492,68.187 ; C5.2@40.462,68.047 37.419,68.047 C8.2@35.789,68.047 ; C31.1@69.723,17.45 v1@69.723,18.669
  Top Layer w0.6: v1(7.493,33.632) 7.493,32.258 8.001,31.75 Q3.2@10.033,31.75 ; 9.455,31.75 ccw(c9.455,32.337) Q3.2@9.87,31.922 ; C27.1@21.768,17.424 v1@21.768,18.948 ; v1(25.4,47.364) C20.1@26.924,47.364 ; S3.1@42.522,19.05 43.688,20.216 C29.1@43.688,21.75 ; S3.1@42.522,19.6 ccw(c42.522,20.928) 43.461,19.989 ccw(c44.4,19.05) S3.1@43.072,19.05 ; C30.1@53.086,17.526 v1(53.086,18.886) ; C22.1@59.225,36.703 59.225,38.048 v1(59.309,38.132)
  Top Layer w0.8: v1(8.89,50.605) Q2.2@10.068,50.605 ; R17.1@11.303,39.751 v1(12.7,39.751) ; C18.1@19.256,67.716 v1(20.879,67.716) ; C24.2@20.701,65.38 v1(22.403,65.38) ; C24.2@20.936,65.097 cw(c21.619,64.414) 21.619,65.38 cw(c21.619,66.345) C24.2@20.936,65.662 ; v1(25.832,72.862) Q1.2@25.832,74.154 ; C28.1@37.426,17.539 cw(c38.007,16.959) v1@38.007,17.78 ; v1(38.354,17.78) C28.1@37.694,17.78 ; v1@38.361,17.829 ccw(c38.201,16.765) C28.1@37.44,17.526 C28.1@37.694,17.78 ; v1@38.385,17.819 ccw(c38.061,17.412) C28.1@37.694,17.78 ; C19.1@41.656,27.178 v2(41.656,28.6) ; v1(61.976,69.621) C16.2@61.976,71.12 ; C15.2@64.041,69.488 cw(c63.508,68.955) 64.262,68.955 ; v1(64.262,68.072) 64.262,69.409 C15.2@64.624,69.771 ; 64.262,68.656 cw(c65.439,68.656) C15.2@64.607,69.488 ; v2(67.377,66.823) U5.1@68.693,66.823 ; v1(68.693,60.579) C14.2@69.63,60.579 ; v1(68.707,63.246) C23.1@71.107,63.246 ; 69.154,60.579 ccw(c69.154,61.702) C14.2@69.948,60.908 ; 69.376,60.579 cw(c69.376,59.77) C14.2@69.948,60.342
  Top Layer w1: C13.1@57.278,25.788 v1(57.278,27.127) ; C12.2@60.892,27.136 v1(60.892,28.708) ; U4.4@64.948,25.828 cw(c64.067,24.947) 65.313,24.947 cw(c66.559,24.947) U4.4@65.678,25.828 ; U4.4@64.948,27.574 ccw(c64.067,28.455) 65.313,28.455 ccw(c66.559,28.455) U4.4@65.678,27.574 ; U4.2@65.313,24.517 U4.4@65.313,26.701 v1(65.313,29.316) ; C10.1@69.978,25.788 69.978,28.575 70.061,28.658 v1(72.906,28.658) C11.2@72.906,26.755
  Bottom Layer w0.4: v1(30.734,73.787) 32.385,73.787 33.239,74.641 U2.34@33.239,76.251 ; v1@30.84,73.681 cw(c31.096,73.425) 31.096,73.787 cw(c31.096,74.149) v1@30.84,73.893 ; v1@46.605,78.634 cw(c46.038,78.067) 46.839,78.067 ; v1(46.711,78.74) 46.839,78.611 U2.17@46.839,76.251
  other v1: 69.698,18.694 21.768,19.025 41.529,21.342 70.061,28.575 39.751,40.76 39.751,43.561 42.418,43.561 44.831,43.561 58.807,44.12 39.751,45.847 44.831,45.847 66.827,45.847 79.502,47.879 39.751,48.292 44.831,48.292 62.069,50.451 30.099,52.393 33.909,52.42 86.1,80.184 77.851,88.751
JXL-A0: U1.5 U2.5 U3.30 | length 41.6
  Top Layer w0.305: v1@52.311,71.309 ccw(c52.081,71.539) 52.407,71.539 ; v1@52.407,71.247 U1.5@52.407,76.504 ; 52.407,71.753 ccw(c53.035,71.753) v1@52.591,71.309
  Top Layer w0.4: U3.30@50.542,48.164 53.041,48.164 54.204,49.327 54.204,56.159 52.324,58.039 52.324,70.866 52.451,70.993 v1(52.451,71.169) ; 52.324,70.5 cw(c53.12,70.5) v1@52.557,71.063
  Bottom Layer w0.4: v1(52.451,71.169) 53.135,71.169 56.435,74.469 U2.5@56.435,76.701 ; v1@52.557,71.063 cw(c52.813,70.807) 52.813,71.169 cw(c52.813,71.531) v1@52.557,71.275
JXL-CS: U1.3 U2.3 U3.28 | length 46.3
  Top Layer w0.305: U1.3@53.407,76.435 53.407,73.72 54.864,72.263 v1(54.864,69.85) ; v1@54.724,69.99 ccw(c54.387,70.327) 54.864,70.327 ccw(c55.341,70.327) v1@55.004,69.99
  Top Layer w0.4: U3.28@50.542,46.564 53.85,46.564 56.388,49.102 56.388,56.007 53.975,58.42 53.975,68.961 v1(54.864,69.85) ; v1@54.714,69.85 cw(c54.352,69.85) 54.608,69.594 cw(c54.864,69.338) v1@54.864,69.7
  Bottom Layer w0.4: v1(54.864,69.85) 54.864,69.934 54.948,69.85 58.035,72.937 U2.3@58.035,76.701 ; v1@54.864,70 ccw(c54.864,70.564) 55.263,70.165
JXL-RST: U1.4 U2.4 U3.29 | length 44.4
  Top Layer w0.305: U1.4@52.907,76.504 52.907,73.244 53.467,72.684 53.467,70.231 v1(53.34,70.104) ; v1@53.2,70.244 ccw(c52.557,70.887) 53.467,70.887
  Top Layer w0.4: U3.29@50.542,47.364 53.587,47.364 55.245,49.022 55.245,56.134 53.137,58.242 53.137,69.901 v1(53.34,70.104) ; 53.137,69.251 cw(c54.193,69.251) v1@53.446,69.998
  Bottom Layer w0.4: v1(53.34,70.104) 53.455,70.104 57.235,73.884 U2.4@57.235,76.701 ; v1@53.34,70.254 ccw(c53.34,70.894) 53.793,70.441
JXL-SCK: U1.14 U2.14 U3.31 | length 39.1
  Top Layer w0.305: U1.14@47.907,76.403 47.907,74.134 49.784,72.257 49.784,72.251 50.032,72.003 50.24,72.003 50.165,71.928 v1(50.165,71.882) ; 49.807,72.228 ccw(c50.165,72.586) v1@50.165,72.08 ; 49.836,72.199 cw(c49.52,71.882) v1@49.967,71.882
  Top Layer w0.4: v1@50.165,71.732 cw(c50.165,71.37) 50.421,71.626 cw(c50.677,71.882) v1@50.315,71.882 ; v1(50.165,71.882) 51.562,70.485 51.562,57.658 53.137,56.083 53.137,49.555 52.546,48.964 U3.31@50.542,48.964
  Bottom Layer w0.4: U2.14@49.235,76.701 49.235,72.812 v1(50.165,71.882) ; v1@50.015,71.882 ccw(c49.653,71.882) 49.909,72.138 ccw(c50.165,72.394) v1@50.165,72.032
JXL-SDA: U1.15 U2.15 U3.32 | length 36.2
  Top Layer w0.305: 47.407,73.701 ccw(c48.345,73.701) v1@47.682,73.038 ; U1.15@47.407,76.403 47.407,72.862 v1@47.498,72.771
  Top Layer w0.4: v1@47.498,72.771 47.604,72.771 50.8,69.575 50.8,57.397 52.197,56 52.197,50.292 51.669,49.764 U3.32@50.542,49.764 ; v1@47.692,72.898 ccw(c48.21,72.898) 47.844,72.532 ; U3.32@51.842,49.764 cw(c52.258,49.764) 51.964,50.059
  Bottom Layer w0.4: v1@47.625,72.771 47.542,72.854 v1(47.542,72.898) 47.542,72.942 48.435,73.835 U2.15@48.435,76.701 ; v1@47.692,72.898 cw(c48.16,72.898) 47.829,73.229
LEDK: LED_1.1 Q1.3 | length 4.7
  Top Layer w1.2: Q1.3@24.882,76.504 LED_1.1@24.882,81.168
MANU-LED: R5.2 U3.44 | length 25.1
  Top Layer w0.432: R5.2@26.23,67.981 cw(c25.781,67.532) 26.416,67.532 ; R5.2@26.416,68.097 26.416,64.135 29.821,60.73 34.926,60.73 39.542,56.115 U3.44@39.542,51.964
MISO: J1.9 U3.3 | length 16.5
  Top Layer w0.4: J1.9@26.937,28.816 ccw(c26.737,29.216) 27.184,29.216 ; J1.9@27.184,28.325 27.184,29.216 ; J1.9@27.431,28.816 cw(c27.631,29.216) 27.184,29.216 ; U3.3@37.942,35.564 37.942,33.395 36.043,31.496 29.464,31.496 27.184,29.216
MOSI: J1.1 U3.2 | length 15.7
  Top Layer w0.4: U3.2@37.142,35.564 37.142,38.031 v1(37.16,38.049) ; 37.142,37.643 cw(c37.567,37.643) v1@37.266,37.943 ; J1.1@37.344,28.325 39.249,30.23 39.249,32.866 v1(39.263,32.879) ; 39.249,32.484 cw(c39.658,32.484) v1@39.369,32.773
  Bottom Layer w0.4: v1@37.16,37.899 cw(c37.16,37.537) 37.416,37.793 cw(c37.672,38.049) v1@37.31,38.049 ; v1(37.16,38.049) 39.319,35.89 39.263,35.834 v1(39.263,32.879) ; v1@39.156,32.985 ccw(c38.9,33.242) 39.263,33.242 ccw(c39.625,33.242) v1@39.369,32.985
NC01: R7.2 R11.2 U1.32 U2.32 | length 23.6
  Top Layer w0.305: v1@32.55,70.549 ccw(c32.213,70.886) 32.69,70.886 ccw(c33.167,70.886) v1@32.83,70.549 ; v1(32.69,70.409) 32.69,71.807 34.416,73.533 37.389,73.533 38.907,75.051 U1.32@38.907,76.403
  Top Layer w0.4: R7.2@31.115,69.444 32.69,69.444 v1(32.69,70.409) ; R7.2@31.22,69.622 ccw(c31.652,70.054) 31.652,69.444 ; 32.114,69.444 ccw(c32.114,70.054) 32.546,69.622 ccw(c32.198,69.97) 32.69,69.97 ; v1@32.584,70.303 cw(c32.328,70.047) 32.69,70.047 cw(c33.052,70.047) v1@32.796,70.303 ; 32.69,69.892 ccw(c33.072,69.892) R11.2@32.802,69.622
  Bottom Layer w0.4: v1@32.584,70.515 ccw(c32.328,70.771) 32.69,70.771 ccw(c33.052,70.771) v1@32.796,70.515 ; v1(32.69,70.409) 32.69,71.552 34.835,73.697 U2.32@34.835,76.701
NetD1_2: D1.2 R4.2 | length 7.7
  Top Layer w0.406: D1.2@5.715,62.713 7.518,62.713 10.109,60.122 R4.2@10.109,57.921
NetD2_1: D2.1 R3.2 | length 6.3
  Top Layer w0.6: R3.2@78.74,65.354 84.76,65.354 D2.1@84.963,65.151 D2.1@84.988,65.176
NetD4_2: D4.2 R15.2 | length 5.2
  Top Layer w0.406: D4.2@5.69,42.24 6.502,43.053 R15.2@9.906,43.053 ; R15.2@9.78,42.927 ccw(c9.477,42.624) 9.477,43.053 ccw(c9.477,43.482) R15.2@9.78,43.179
NetLED_2_1: LED_2.1 R1.2 | length 6.4
  Top Layer w0.762: LED_2.1@65.964,81.28 R1.2@72.344,81.28
NetQ1_1: Q1.1 R5.1 R8.2 | length 8
  Top Layer w0.4: Q1.1@23.755,73.952 cw(c23.156,73.353) 24.003,73.353 ; Q1.1@23.932,74.154 24.003,74.083 24.003,70.475 R8.2@24.882,69.596 ; R8.2@24.882,69.52 26.391,69.52 R5.1@26.416,69.494 ; R8.2@24.893,69.366 cw(c25.263,68.996) 25.263,69.52 ; 25.848,69.52 cw(c25.848,68.996) R5.1@26.219,69.366
NetQ2_1: Q2.1 R6.2 R10.2 | length 6.6
  Top Layer w0.4: R10.2@9.778,54.685 cw(c9.224,54.131) 10.008,54.131 ; R10.2@9.778,54.941 ccw(c9.224,55.495) 10.008,55.495 ; R6.2@9.778,56.26 cw(c9.224,55.706) 10.008,55.706 ; Q2.1@9.866,52.681 ccw(c9.523,53.024) 10.008,53.024 ; Q2.1@10.008,52.572 R6.2@10.008,56.413 ; 10.008,53.193 ccw(c10.73,53.193) Q2.1@10.219,52.681
NetQ3_1: Q3.1 R16.2 R17.2 | length 10.3
  Top Layer w0.4: R17.2@9.778,39.623 cw(c9.469,39.314) 9.906,39.314 cw(c10.343,39.314) R17.2@10.034,39.623 ; R17.2@9.778,39.879 ccw(c9.469,40.188) 9.906,40.188 ccw(c10.343,40.188) R17.2@10.034,39.879 ; R16.2@9.778,41.274 cw(c9.469,40.965) 9.906,40.965 cw(c10.343,40.965) R16.2@10.034,41.274 ; R16.2@9.906,41.402 R17.2@9.906,39.751 9.906,38.691 9.271,38.056 9.271,34.446 Q3.1@10.001,33.716
NetR18_2: R18.2 U6.7 | length 8.9
  Top Layer w0.508: U6.7@43.32,62.91 43.32,64.148 44.323,65.151 47.498,65.151 49.149,63.5 49.403,63.5 cw(c49.403,64.113) 48.969,63.68
OUT-HIGH: J3.11 J3.12 Q2.3 R2.1 | length 95.9
  Top Layer w0.4: R2.1@11.557,48.768 12.418,49.629 v1(12.418,49.911) Q2.3@12.418,51.555 ; Q2.3@12.241,51.378 cw(c11.814,50.951) 12.418,50.951 cw(c13.021,50.951) Q2.3@12.594,51.378 ; v1@12.311,50.017 ccw(c12.055,50.273) 12.418,50.273 ccw(c12.78,50.273) v1@12.524,50.017
  Bottom Layer w0.4: v1@12.432,49.798 13.716,48.514 13.716,34.036 16.891,30.861 45.288,30.861 47.447,33.02 60.071,33.02 62.611,35.56
  Bottom Layer w0.406: 62.611,35.56 65.278,38.227 65.278,46.863 66.802,48.387 74.926,48.387 J3.11@75.021,48.292
OUT-LOW: J3.13 J3.14 Q3.3 R14.1 | length 91.4
  Top Layer w0.4: R14.1@11.811,30.226 12.468,30.883 Q3.3@12.468,32.639 ; Q3.3@12.468,32.766 17.145,32.766 v1(17.653,32.258) ; Q3.3@12.553,32.589 cw(c12.98,32.162) 12.98,32.766 cw(c12.98,33.37) Q3.3@12.553,32.943 ; v1@17.503,32.258 ccw(c17.141,32.258) 17.397,32.514 ccw(c17.653,32.77) v1@17.653,32.408
  Bottom Layer w0.4: v1(17.653,32.258) 17.653,32.36 17.678,32.385 18.39,31.674 45.263,31.674 47.244,33.655 59.817,33.655 64.725,38.563 64.725,47.199 68.262,50.736 ; 70.56,50.736 ccw(c70.56,52.753) 71.986,51.327 cw(c71.02,52.293) 71.02,50.927 ; 70.562,50.927 cw(c70.562,48.913) 71.986,50.337 ccw(c71.022,49.373) 71.022,50.736 ; 71.526,50.736 ccw(c71.526,51.787) J3.14@72.269,51.044 ; 71.527,50.927 cw(c71.527,49.878) J3.14@72.269,50.62 ; J3.14@72.238,50.927 68.453,50.927 68.262,50.736 ; J3.13@75.021,50.832 74.925,50.736 68.262,50.736
OUT_CLEAR: J3.15 J3.16 U3.34 | length 31.4
  Top Layer w0.4: U3.34@47.542,51.964 47.542,53.892 48.26,54.61 v1(51.054,54.61) ; v1@50.948,54.504 ccw(c50.692,54.248) 50.692,54.61 ccw(c50.692,54.972) v1@50.948,54.716
  Bottom Layer w0.4: v1(51.054,54.61) 64.008,54.61 65.151,53.467 74.926,53.467 J3.15@75.021,53.372 ; v1@51.16,54.504 cw(c51.416,54.248) 51.416,54.61 cw(c51.416,54.972) v1@51.16,54.716
PA0: J4.14 U3.51 | length 19.8
  Top Layer w0.4: J4.14@16.576,50.92 17.853,52.197 27.559,52.197 31.592,48.164 U3.51@34.142,48.164
PA1: U3.50
PA2: U3.49
PB0: C27.2 R20.1 S1.2 U3.10 | length 55.8
  Top Layer w0.4: C27.2@21.768,16.027 22.657,16.027 23.749,17.12 23.749,20.32 27.051,23.622 42.037,23.622 43.542,25.127 U3.10@43.542,35.564 ; C27.2@21.896,15.899 cw(c22.205,15.59) 22.205,16.027 cw(c22.205,16.464) C27.2@21.896,16.155
  Top Layer w0.8: S1.2@10.33,14.423 S1.2@16.83,14.423 18.434,16.027 R20.1@19.99,16.027 C27.2@21.768,16.027 ; S1.2@10.648,14.105 cw(c11.416,13.337) 11.416,14.423 cw(c11.416,15.509) S1.2@10.648,14.741 ; S1.2@16.512,14.105 ccw(c15.744,13.337) 15.744,14.423 ccw(c15.744,15.509) S1.2@16.512,14.741 ; S1.2@16.83,14.873 ccw(c16.83,15.959) 17.598,15.191 ccw(c18.366,14.423) S1.2@17.28,14.423
PB1: J1.7 Q4.2 R25.1 U3.11 | length 37.7
  Top Layer w0.4: R25.1@35.814,21.082 36.068,21.336 Q4.2@38.557,21.336 38.557,22.174 39.276,22.893 42.324,22.893 44.342,24.911 U3.11@44.342,35.564 ; R25.1@35.942,21.081 cw(c36.558,20.465) 36.558,21.336 ; v1@37.232,21.23 ccw(c36.976,20.974) 36.976,21.336 ccw(c36.976,21.698) v1@37.232,21.442 ; v1@37.444,21.23 cw(c37.7,20.974) 37.7,21.336 cw(c37.7,21.698) v1@37.444,21.442 ; Q4.2@38.375,21.154 ccw(c37.936,20.715) 37.936,21.336 ccw(c37.936,21.957) 38.375,21.518 ccw(c37.936,21.957) 38.557,21.957 ccw(c39.178,21.957) Q4.2@38.739,21.518
  Bottom Layer w0.4: J1.7@29.724,28.325 30.988,27.061 30.988,23.876 33.542,21.322 37.324,21.322 v1(37.338,21.336) v1@37.341,21.339 ; 36.943,21.322 ccw(c36.943,21.731) v1@37.232,21.442
PB2: C29.2 R22.1 S3.2 U3.12 | length 37.1
  Top Layer w0.4: C29.2@44.957,21.878 ccw(c44.511,22.324) 45.142,22.324 ; C29.2@45.085,21.75 C29.2@45.142,21.75 ; U3.12@45.142,35.564 C29.2@45.142,21.75 ; C29.2@45.213,21.622 cw(c45.522,21.313) 45.522,21.75 cw(c45.522,22.187) C29.2@45.213,21.878 ; R22.1@46.652,21.622 ccw(c46.343,21.313) 46.343,21.75 ccw(c46.343,22.187) R22.1@46.652,21.878 ; R22.1@46.78,21.75 C29.2@45.142,21.75
  Top Layer w0.8: S3.2@42.522,14.55 S3.2@49.022,14.55 46.78,16.792 R22.1@46.78,21.75 ; S3.2@42.84,14.232 cw(c43.608,13.464) 43.608,14.55 cw(c43.608,15.636) S3.2@42.84,14.868 ; S3.2@48.572,14.55 ccw(c47.486,14.55) 48.254,15.318 ccw(c49.022,16.086) S3.2@49.022,15 ; S3.2@48.704,14.232 ccw(c47.936,13.464) 47.936,14.55 ccw(c47.936,15.636) S3.2@48.704,14.868
PB3: C30.2 R23.1 S4.2 U3.13 | length 40.8
  Top Layer w0.4: U3.13@45.942,35.564 45.942,26.787 51.407,21.322 51.407,16.519 51.797,16.129 C30.2@53.086,16.129 ; C30.2@52.958,16.001 ccw(c52.649,15.692) 52.649,16.129 ccw(c52.649,16.566) C30.2@52.958,16.257
  Top Layer w0.8: 53.721,16.129 54.999,16.129 56.615,14.513 S4.2@58.364,14.513 S4.2@64.864,14.513 ; S4.2@58.046,14.195 ccw(c57.278,13.427) 57.278,14.513 ccw(c57.278,15.599) S4.2@58.046,14.831 ; S4.2@58.682,14.195 cw(c59.45,13.427) 59.45,14.513 cw(c59.45,15.599) S4.2@58.682,14.831 ; S4.2@64.546,14.195 ccw(c63.778,13.427) 63.778,14.513 ccw(c63.778,15.599) S4.2@64.546,14.831